# Altium PCB ISL6236A_DEMO_PCB_V1I1.PcbDoc
Units mm, origin at the board's own origin, x right, y up, seen from the top; angles counter-clockwise.
Board outline 50 x 50 mm, 6 copper layers (L1, L2, L3, L4, L5, L6), stack 0.816 mm thick; 41 components, 27 nets, 119 pads, 100 vias.
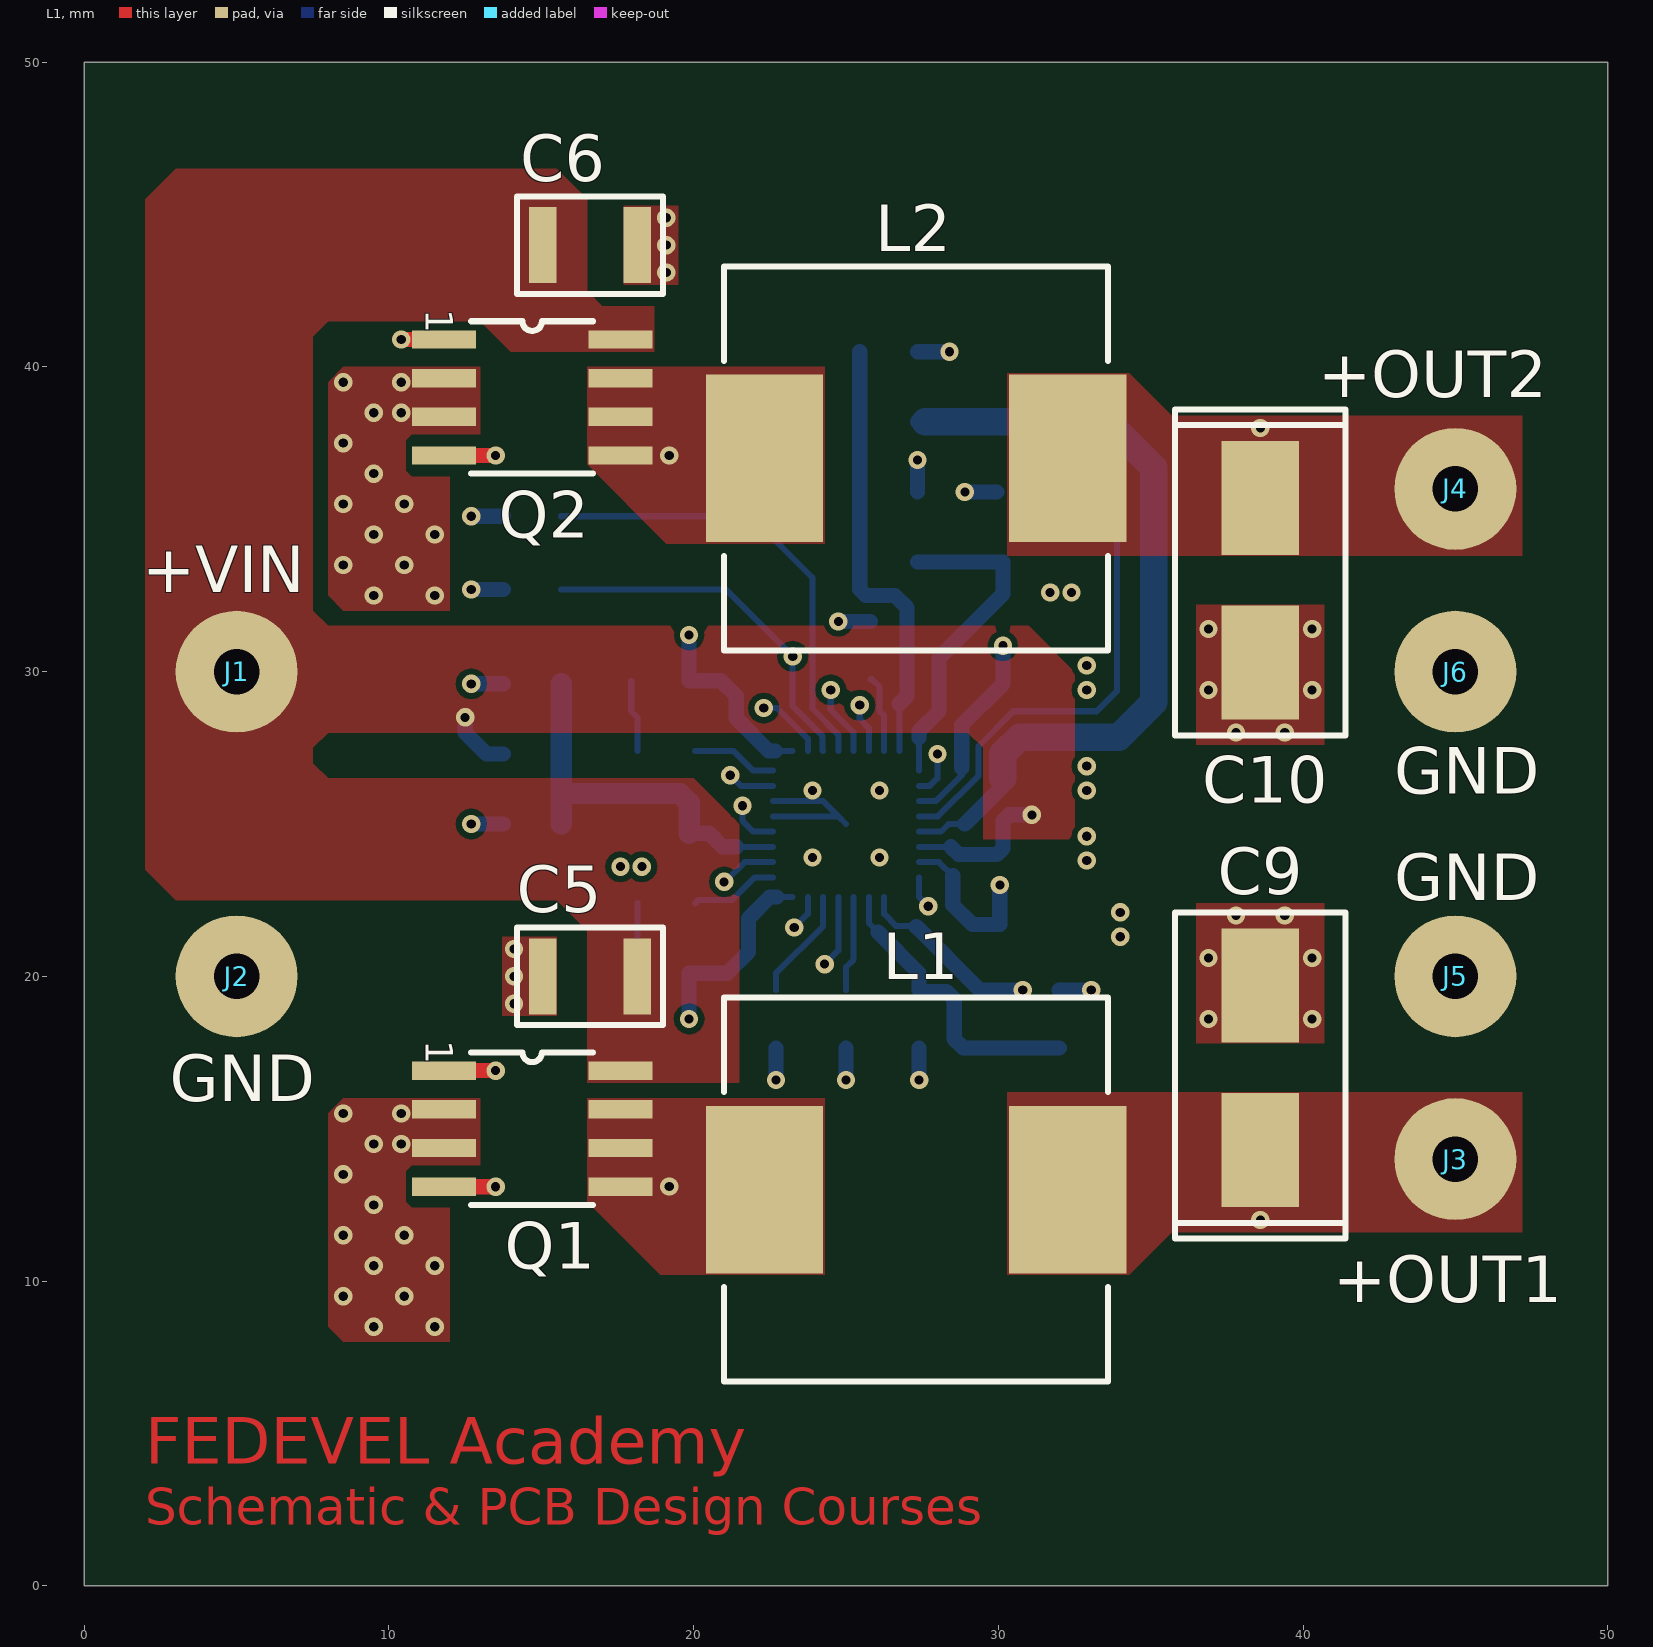
[diagram p0: L1 view]
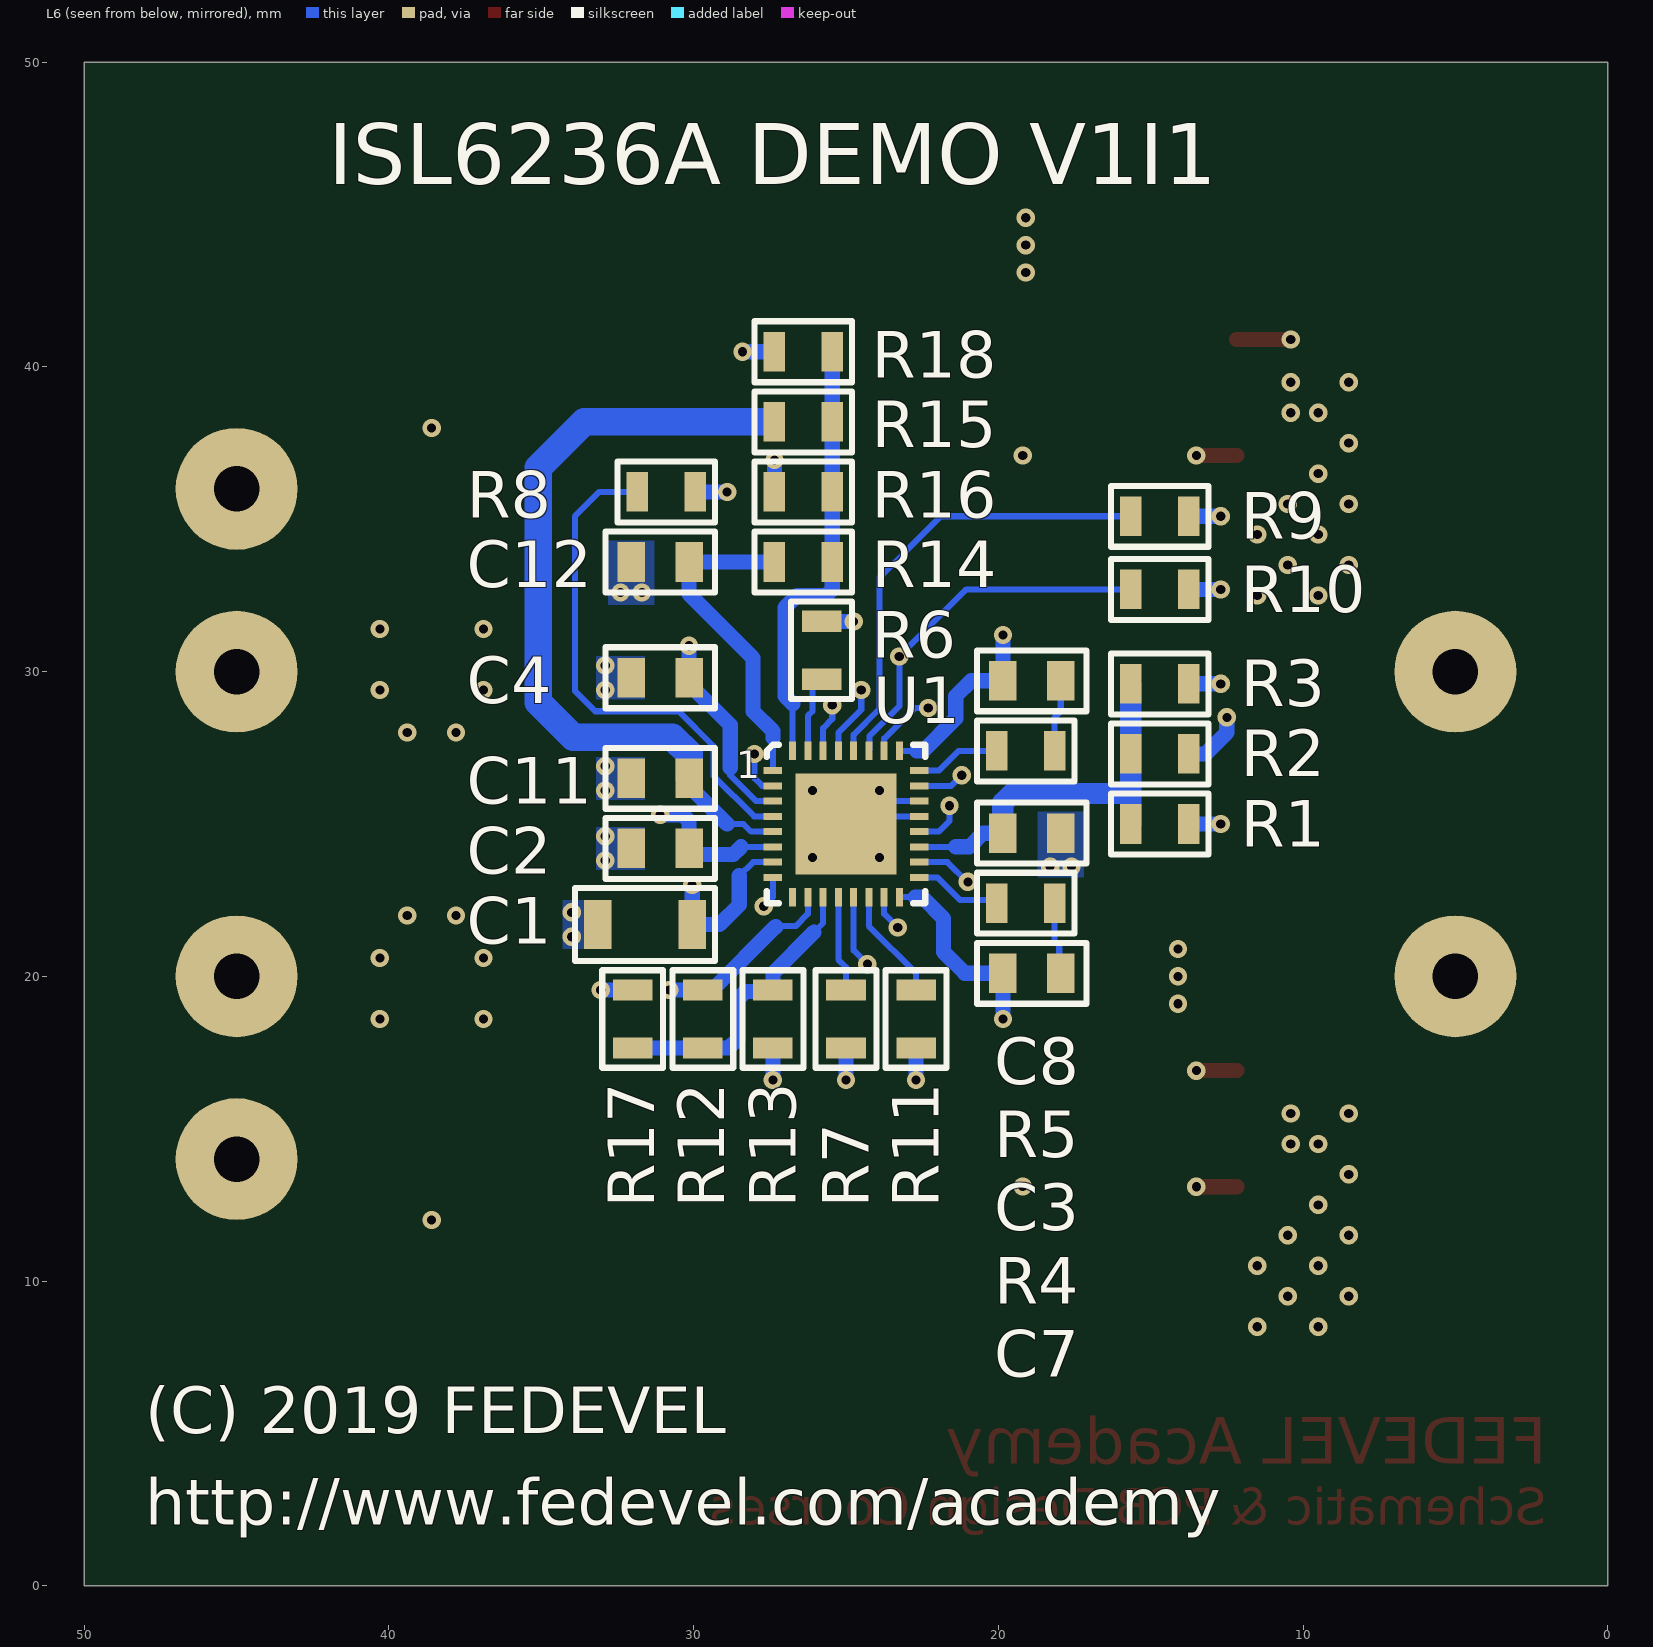
[diagram p1: L6 view, seen from below]
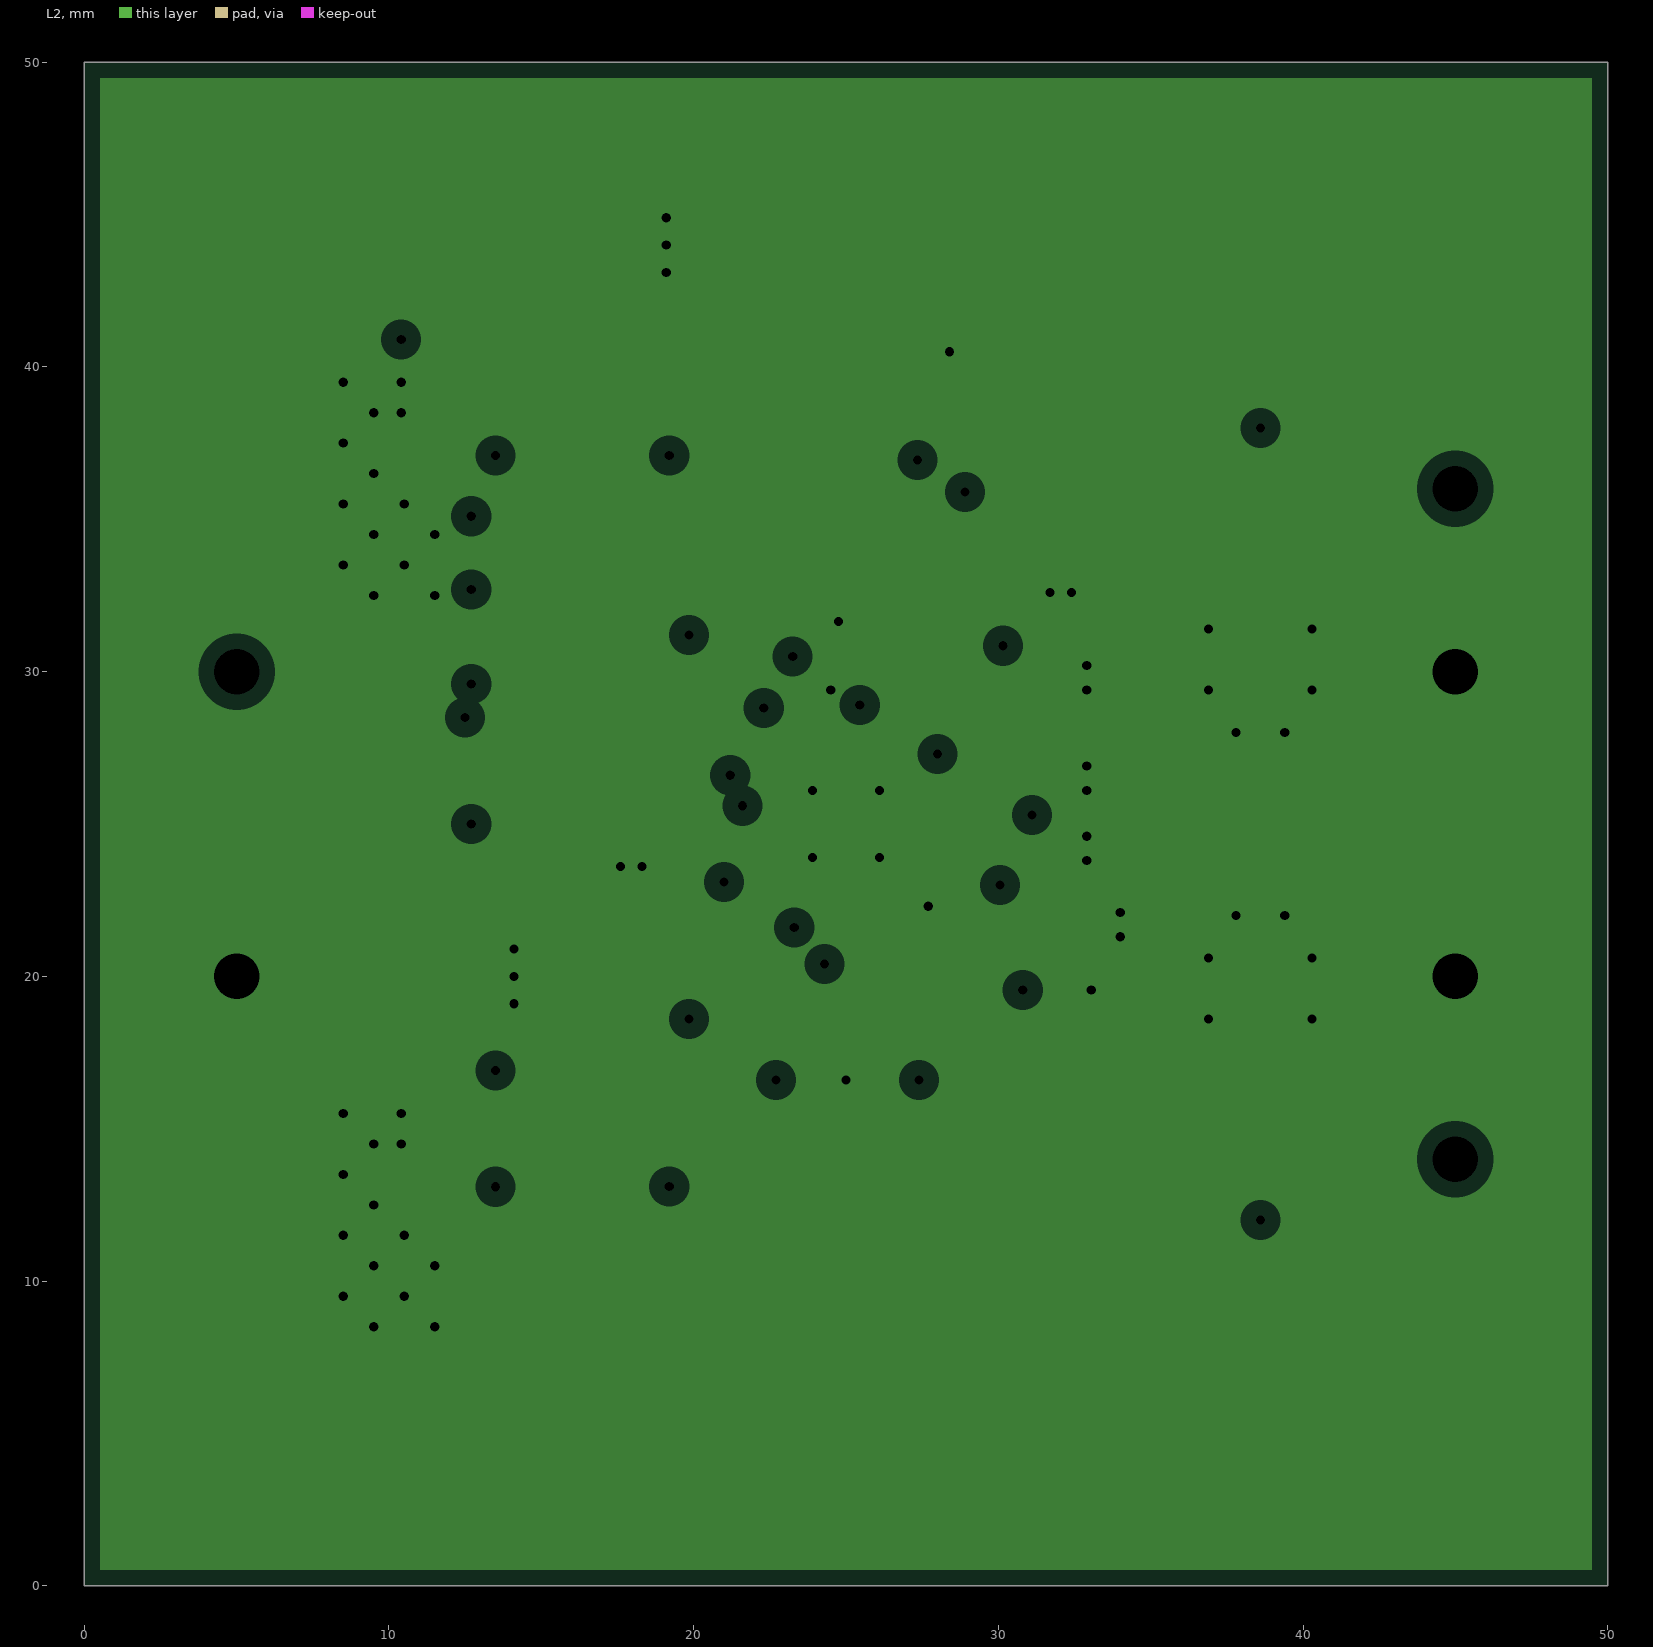
[diagram p2: L2, clearances drawn from the general rule]
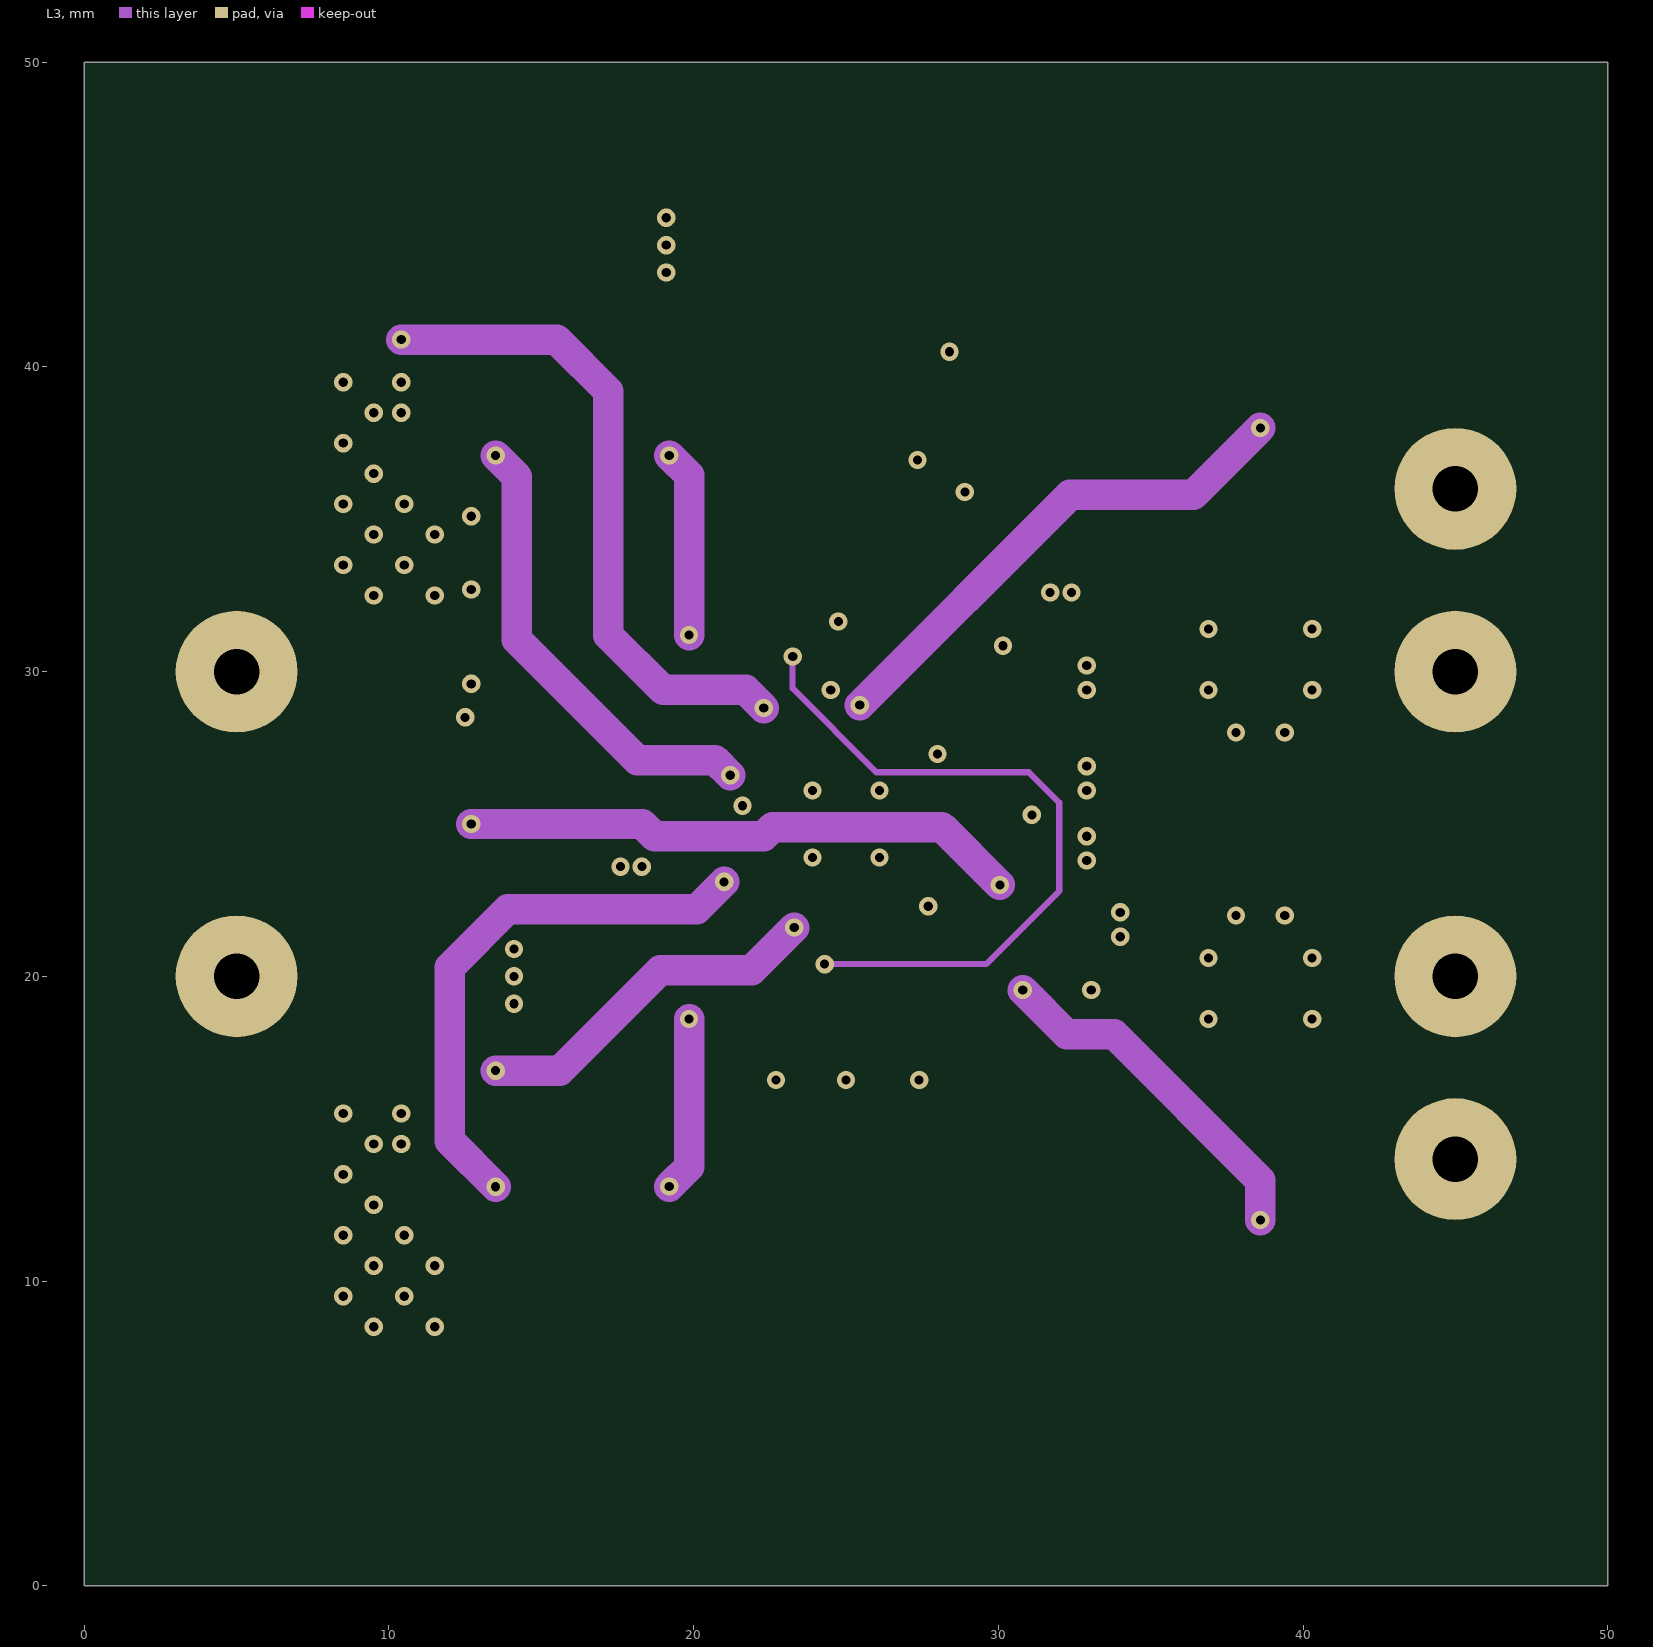
[diagram p3: L3]
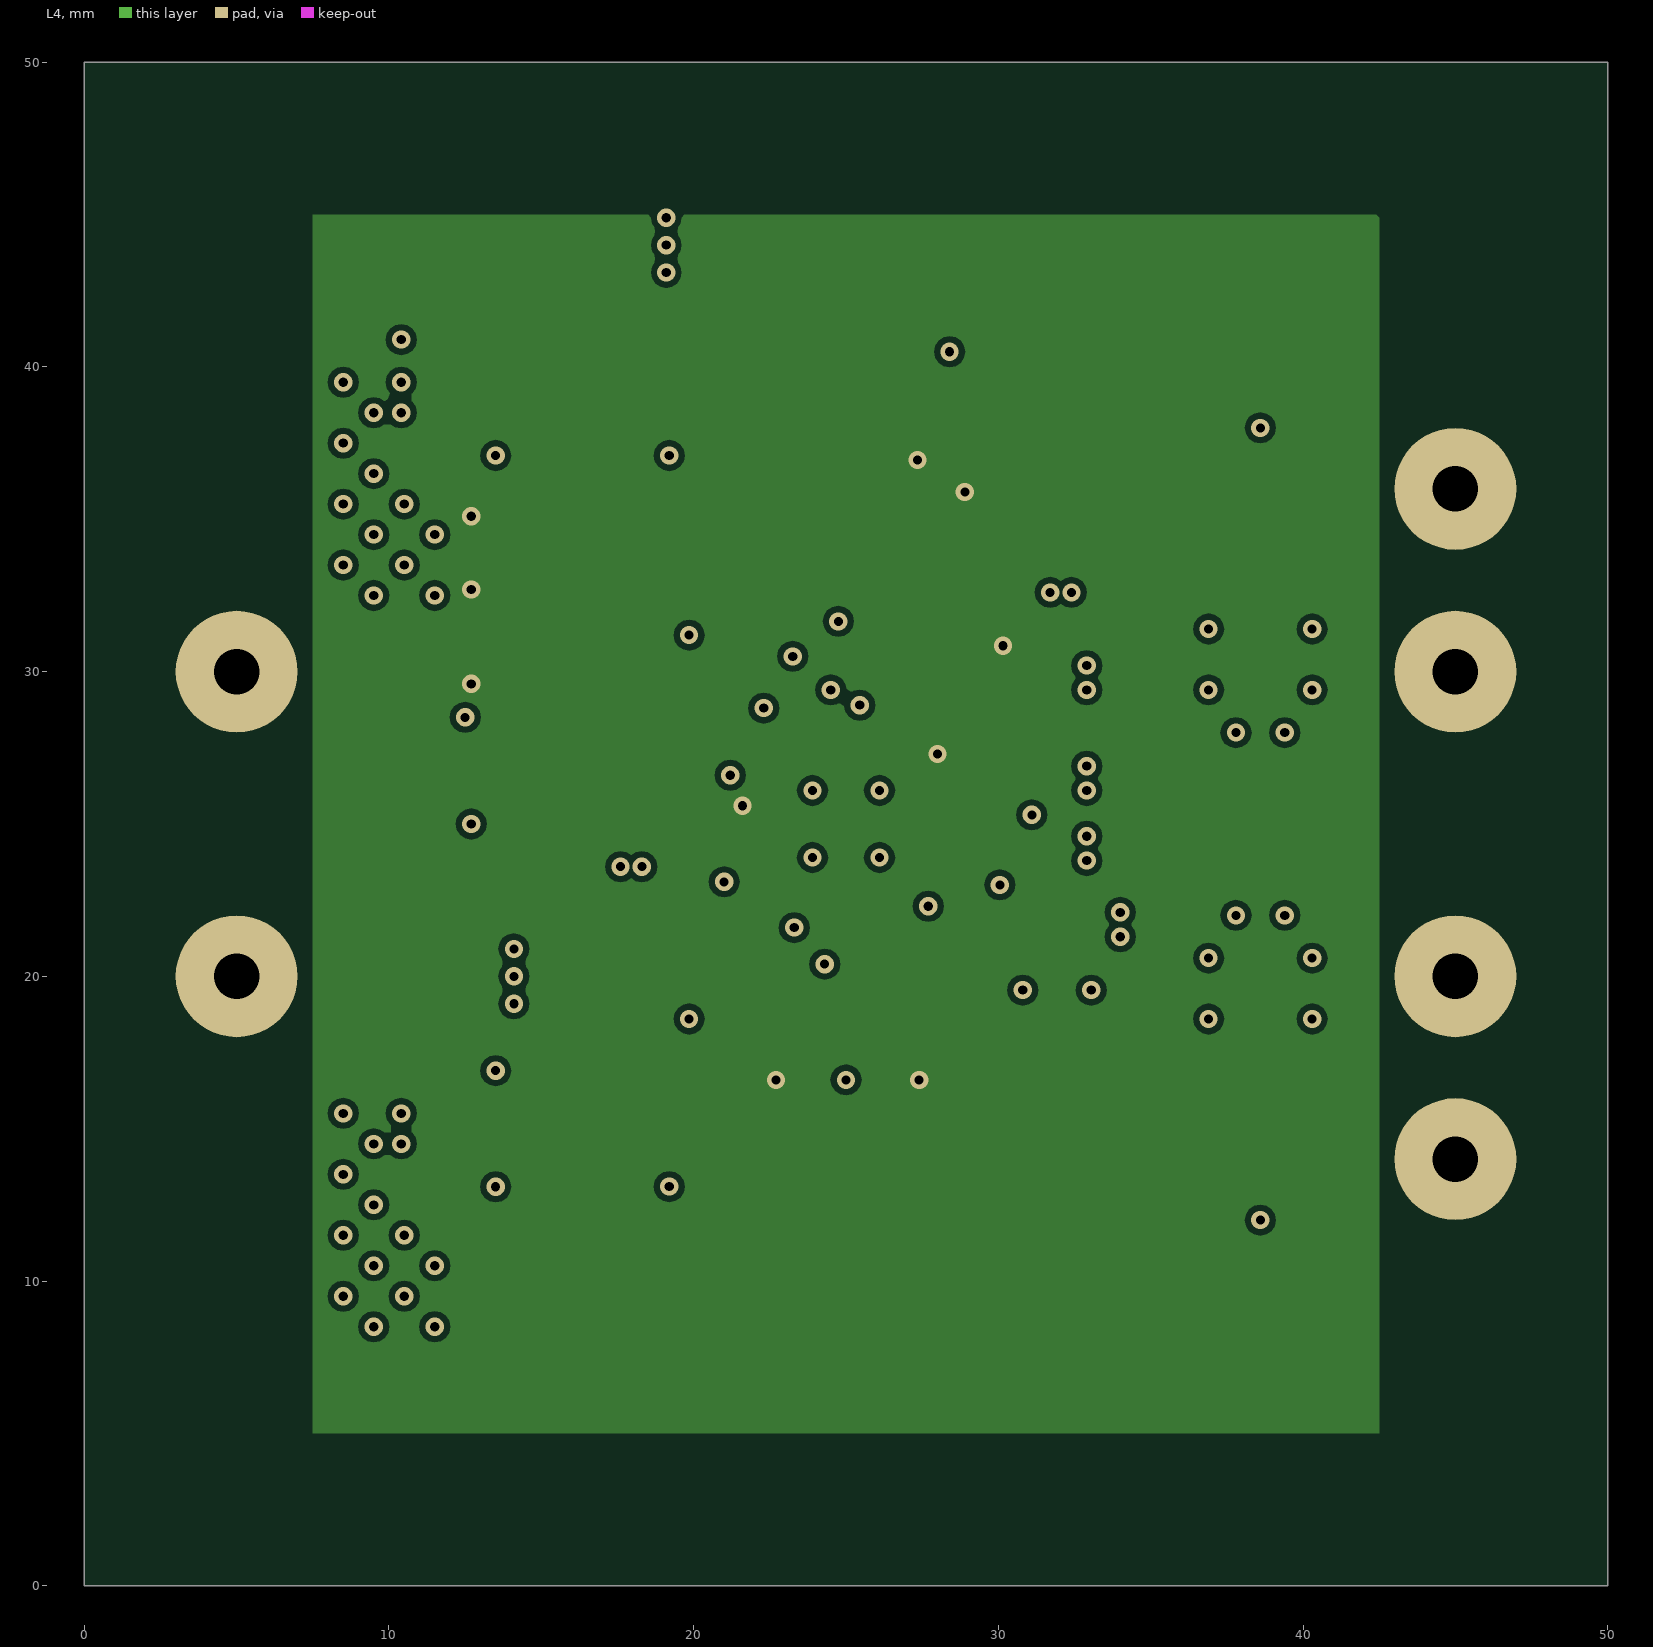
[diagram p4: L4]
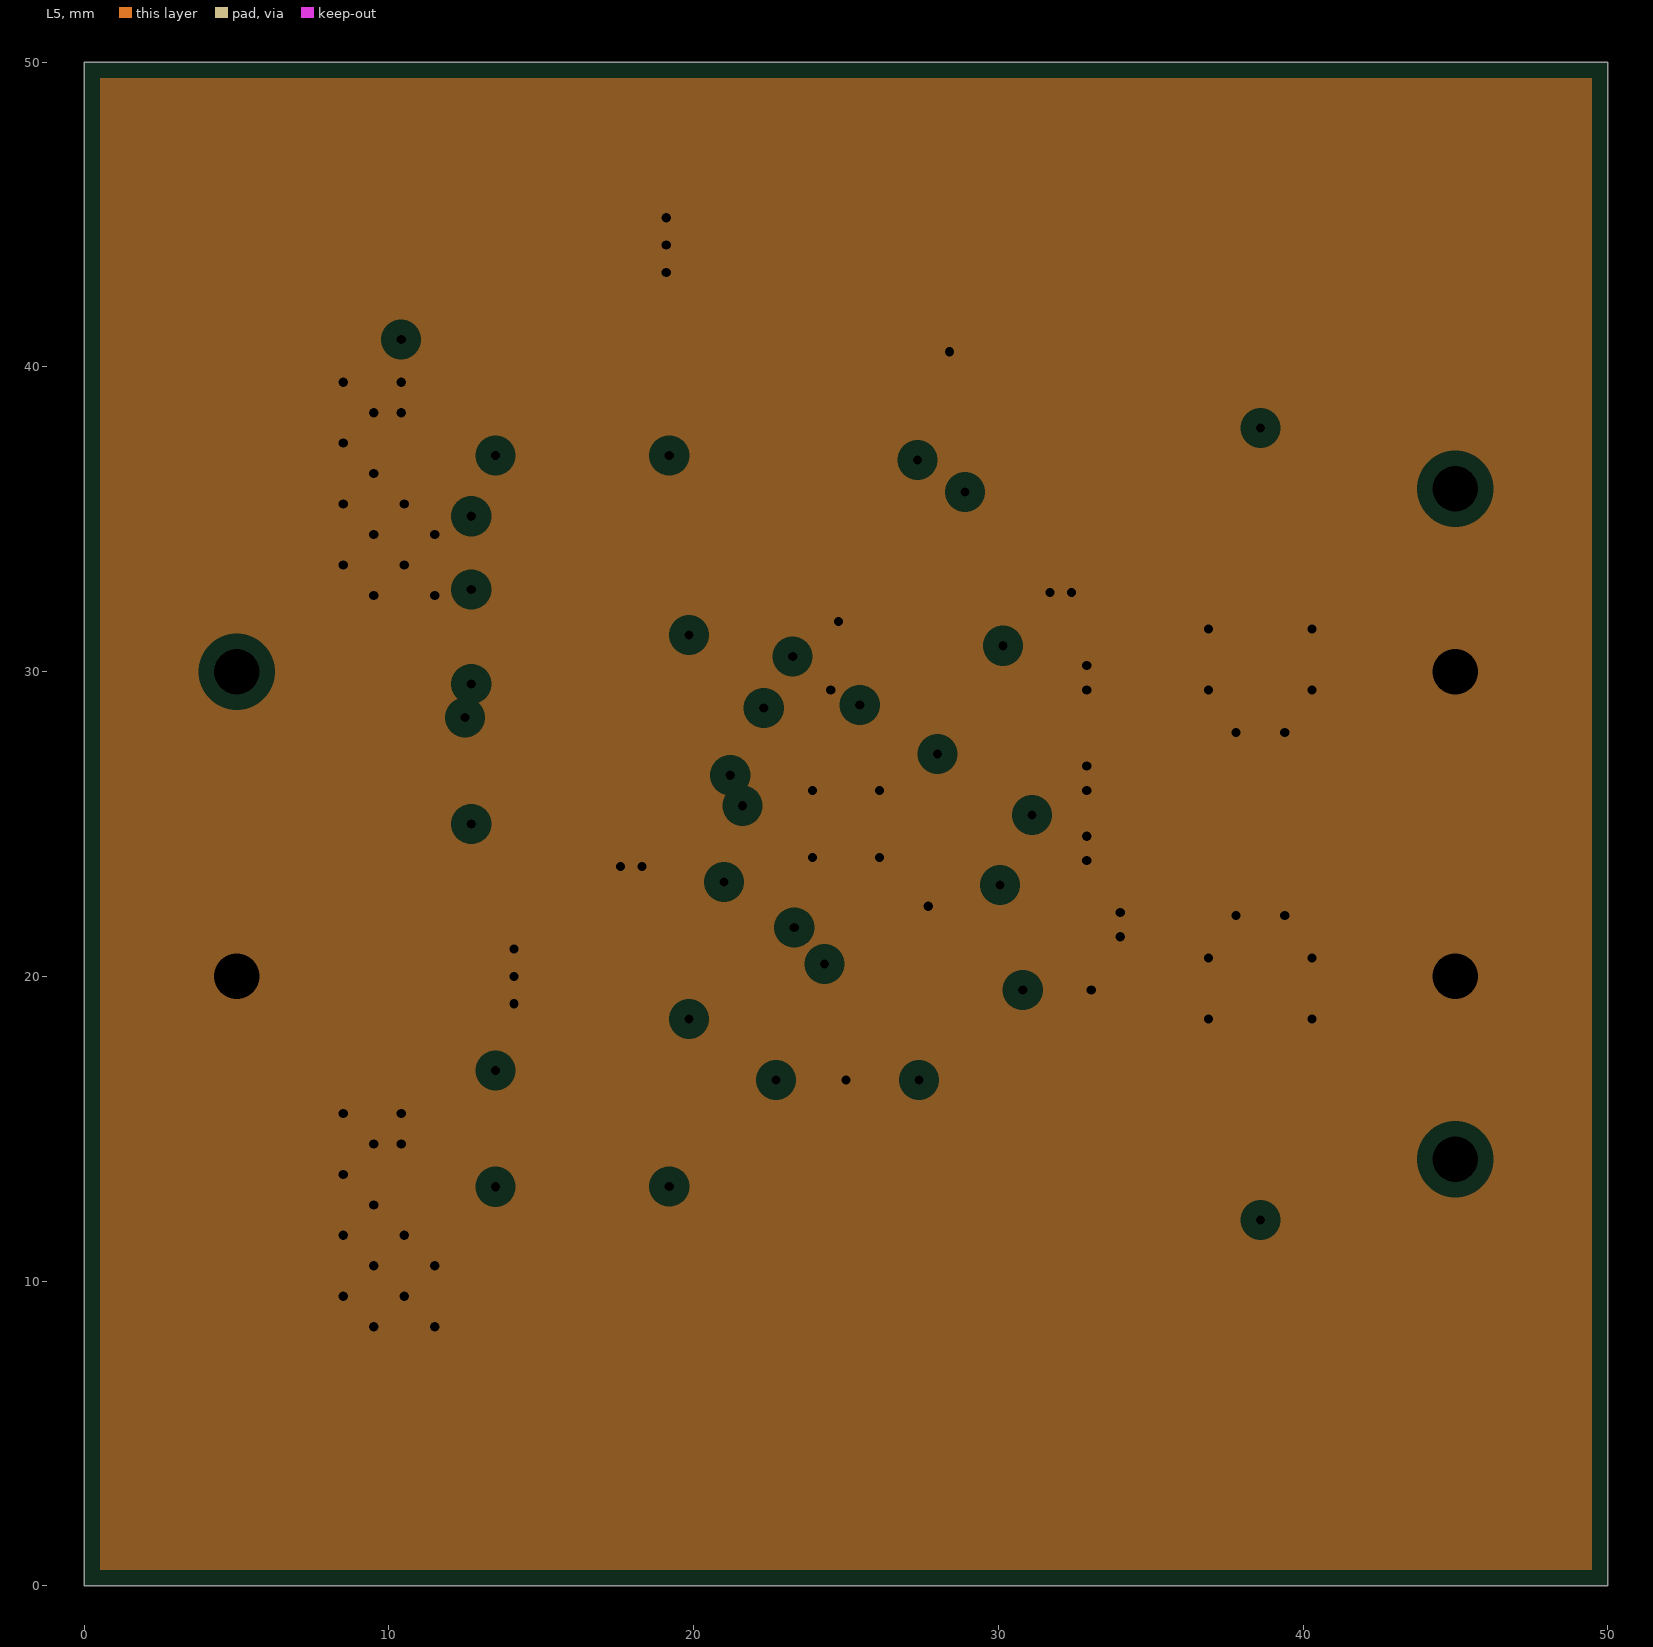
[diagram p5: L5, clearances drawn from the general rule]

## Layer stack, top to bottom
Top Solder: solder mask 0.0102, Solder Resist, Dk 3.5
L1: signal copper 0.0356
Dielectric 2: prepreg 0.0711, PP-006, Dk 4.1
L2: plane copper 0.035, net GND
Dielectric 3: prepreg 0.0711, PP-006, Dk 4.1
L3: signal copper 0.035
Dielectric 4: prepreg 0.0711, PP-006, Dk 4.1
L4: signal copper 0.035
Dielectric 5: prepreg 0.0711, PP-006, Dk 4.1
L5: plane copper 0.035, net GND
Dielectric 1: dielectric 0.32, FR-4, Dk 4.8
L6: signal copper 0.0356
Bottom Solder: solder mask 0.0102, Solder Resist, Dk 3.5

## Board outline
0,0 50,0 50,50 0,50

## Design rules (kind name [scope] priority, off if disabled: settings)
Clearance [All] p1: gap=0.2 ignorepadtopadclearanceinfootprint=FALSE
ComponentClearance [All] p1: gap=0.099 collisioncheckmode=3 verticalgap=0.099 showdistances=FALSE
MinimumSolderMaskSliver [All] p1: minsoldermaskwidth=0.1
PlaneClearance [All] p1: clearance=0.508
PlaneConnect [All] p1: pad.planeconnectstyle=Relief pad.reliefexpansion=0.508 pad.reliefentries=4 pad.reliefconductorwidth=1 pad.reliefairgap=0.5 via.planeconnectstyle=Direct via.reliefexpansion=0.508 via.reliefentries=4 via.reliefconductorwidth=0.254 via.reliefairgap=0.254
PolygonConnect [All] p1: connectstyle=Direct reliefconductorwidth=0.254 reliefentries=4 polygonreliefangle="90 Angle" airgapwidth=0.254
RoutingVias [All] p1: holewidth=0.3 width=0.6 viastyle="Through Hole" minholewidth=0.3 minwidth=0.6 maxholewidth=0.3 maxwidth=0.6
SilkToSolderMaskClearance [IsPad] p1: minsilkscreentomaskgap=0.1 clearancetoexposedcopper=TRUE
SolderMaskExpansion [All] p1: expansion=0.102
Width [All] p1: maxlimit=10 minlimit=0.2 preferedwidth=0.2
25 further rules are at their usual default settings.

## Components (designator, comment, footprint, x,y, rotation, side; value= is the part's Value field where it differs from the comment)
C1 "4u7, 50V" C1206 31.6,21.7 r180 bottom
C2 "1uF, 50V" C0805 31.1,24.2 r180 bottom
C3 "1uF, 50V" C0805 18.9,24.7 r0 bottom
C4 "1uF, 50V" C0805 31.1,29.8 r180 bottom
C5 "10uF, 35V" C1210 16.6,20 r0 top
C6 "10uF, 35V" C1210 16.6,44 r180 top
C7 "100nF" C0805 18.9,20.1 r180 bottom
C8 "220nF" C0805 18.9,29.7 r0 bottom
C9 "330uF, 10V" 7343-43 38.6,17 r90 top
C10 "330uF, 10V" 7343-43 38.6,33 r270 top
C11 "10nF" C0805 31.1,26.5 r0 bottom
C12 "100nF" C0805 31.1,33.6 r0 bottom
J1 "4MMx1.5MM" PAD_WITH_HOLE_4MMx1MM5 5,30 r0 top
J2 "4MMx1.5MM" PAD_WITH_HOLE_4MMx1MM5 5,20 r0 top
J3 "4MMx1.5MM" PAD_WITH_HOLE_4MMx1MM5 45,14 r0 top
J4 "4MMx1.5MM" PAD_WITH_HOLE_4MMx1MM5 45,36 r0 top
J5 "4MMx1.5MM" PAD_WITH_HOLE_4MMx1MM5 45,20 r0 top
J6 "4MMx1.5MM" PAD_WITH_HOLE_4MMx1MM5 45,30 r0 top
L1 "3u3, DR125-3R3-R" DR125 27.3,13 r180 top
L2 "2u2, DR125-2R2-R" DR125 27.3,37 r0 top
Q1 "SI4816BDY-T1-E3" SO-8 14.7,15 r0 top
Q2 "SI4816BDY-T1-E3" SO-8 14.7,39 r0 top
R1 "0R" R0805 14.7,25 r180 bottom
R2 "0R" R0805 14.7,27.3 r0 bottom
R3 "10R" R0805 14.7,29.6 r180 bottom
R4 "1R" R0805 19.1,22.4 r0 bottom
R5 "1R" R0805 19.1,27.4 r180 bottom
R6 "200k" R0805 25.8,30.7 r90 bottom
R7 "200k" R0805 25,18.6 r90 bottom
R8 "10k" R0805 30.9,35.9 r180 bottom
R9 "200k" R0805 14.7,35.1 r180 bottom
R10 "200k" R0805 14.7,32.7 r180 bottom
R11 "10k" R0805 22.7,18.6 r270 bottom
R12 "DNF" R0805 29.7,18.6 r90 bottom
R13 "0R" R0805 27.4,18.6 r270 bottom
R14 "DNF" R0805 26.4,33.6 r0 bottom
R15 "0R" R0805 26.4,38.2 r0 bottom
R16 "DNF" R0805 26.4,35.9 r0 bottom
R17 "DNF" R0805 32,18.6 r270 bottom
R18 "DNF" R0805 26.4,40.5 r180 bottom
U1 "ISL6236AIRZ" L32.5x5B 25,25 r180 bottom

## Footprints (in the part's own frame and the unit in brackets; to place one, negate y for a bottom-side part, rotate by r counter-clockwise, add the part's x,y. Pads: shape width x height; smd on the part's side, far side on the other; paste and mask are expansions set on the pad)
7343-43 [mm]
  rect 3.75x2.55 smd: 1(-2.7,0) 2(2.7,0)
  silkscreen extent -5.6,-2.8 5.1,2.8
C0805 [mm]
  rect 0.9x1.3 smd: 1(-0.95,0) 2(0.95,0)
  silkscreen extent -1.8,-1 1.8,1
C1206 [mm]
  rect 0.9x1.6 smd: 1(-1.55,0) 2(1.55,0)
  silkscreen extent -2.3,-1.2 2.3,1.2
C1210 [mm]
  rect 0.9x2.5 smd: 1(-1.55,0) 2(1.55,0)
  silkscreen extent -2.4,-1.6 2.4,1.6
DR125 [mm]
  rect 3.85x5.5 smd: 1(-4.975,0) 2(4.975,0)
  silkscreen extent -6.3,-6.3 6.3,6.3
L32.5x5B [mm]
  rect 0.6x0.23 smd mask+0.051: 1(-2.4,1.75) 2(-2.4,1.25) 3(-2.4,0.75) 4(-2.4,0.25) 5(-2.4,-0.25) 6(-2.4,-0.75) 7(-2.4,-1.25) 8(-2.4,-1.75) 17(2.4,-1.75) 18(2.4,-1.25) 19(2.4,-0.75) 20(2.4,-0.25) 21(2.4,0.25) 22(2.4,0.75) 23(2.4,1.25) 24(2.4,1.75)
  rect 0.23x0.6 smd mask+0.051: 9(-1.75,-2.4) 10(-1.25,-2.4) 11(-0.75,-2.4) 12(-0.25,-2.4) 13(0.25,-2.4) 14(0.75,-2.4) 15(1.25,-2.4) 16(1.75,-2.4) 25(1.75,2.4) 26(1.25,2.4) 27(0.75,2.4) 28(0.25,2.4) 29(-0.25,2.4) 30(-0.75,2.4) 31(-1.25,2.4) 32(-1.75,2.4)
  rect 3.3x3.3 smd mask+0.051: 33(0,0)
  silkscreen extent -2.6,-2.6 2.6,2.6
PAD_WITH_HOLE_4MMx1MM5 [mm]
  round 4 hole 1.5: 1(0,0)
R0805 [mm]
  rect 0.7x1.3 smd: 1(-0.95,0) 2(0.95,0)
  silkscreen extent -1.6,-1 1.6,1
SO-8 [mm]
  rect 2.1x0.6 smd: 1(-2.9,1.905) 2(-2.9,0.635) 3(-2.9,-0.635) 4(-2.9,-1.905) 5(2.9,-1.905) 6(2.9,-0.635) 7(2.9,0.635) 8(2.9,1.905)
  silkscreen extent -2,-2.5 2,2.5

## Part data
C1: library part C3216X5R1H475K160AB, "CAP CER 4.7UF 50V X5R 1206", Capacitance=4.7uF, Case/Package=1206, Case Code (Metric)=3216, Dielectric=X5R, Dielectric Material=Ceramic, Manufacturer=TDK, Max Operating Temperature=85°C, Min Operating Temperature=-55°C, Package Quantity=1, Supplier Part Number 1=445-5994-1-ND, Tolerance=10%, Voltage Rating=50V, Case Code (Imperial)=1206, ComponentLink1Description=http://www.mouser.com/ds/2/400/lcc_commercial_general_en-837201.pdf, ComponentLink1URL=http://www.mouser.com/ds/2/400/lcc_commercial_general_en-837201.pdf, ComponentLink2Description=https://product.tdk.com/en/products/common/pdf/mlcc_partnumber_description.pdf, ComponentLink2URL=https://product.tdk.com/en/products/common/pdf/mlcc_partnumber_description.pdf, ComponentLink3Description=https://product.tdk.com/info/en/documents/chara_sheet/C3216X5R1H475K160AB.pdf, ComponentLink3URL=https://product.tdk.com/info/en/documents/chara_sheet/C3216X5R1H475K160AB.pdf, Composition=Ceramic, Depth=1.6mm, Height=1.6mm, Lead Free="Lead Free", Length=3.2mm, Manufacturer Part Number=C3216X5R1H475K160AB, Mount="Surface Mount", Packaging="Tape and Reel", Pricing 1="1 = 1.02000, 10 = 0.75500, 100 = 0.51750, 500 = 0.40968, 1000 = 0.34500 (USD)", RoHS=Yes, Stock 1=5017, Supplier 1=Digi-Key, Termination=SMD/SMT, Thickness=0.071inch, Voltage Rating (DC)=50V, Weight=0.000571oz, Width=1.6mm
C2 C3 C4: library part C0805C105K5RACTU, "Multilayer Ceramic Capacitors MLCC - SMD/SMT 1uF 50 Volts 10% X7R", Capacitance=1uF, Case/Package=0805, Case Code (Metric)=2012, Dielectric=X7R, Dielectric Material=Ceramic, Manufacturer=KEMET, Max Operating Temperature=125°C, Min Operating Temperature=-55°C, Package Quantity=1, Supplier Part Number 1=399-7409-1-ND, Tolerance=10%, Voltage=50V, Case Code (Imperial)=0805, ComponentLink1Description=http://www.farnell.com/datasheets/1851736.pdf, ComponentLink1URL=http://www.farnell.com/datasheets/1851736.pdf, ComponentLink2Description=http://www.mouser.com/ds/2/212/KEM_C1002_X7R_SMD-1102033.pdf, ComponentLink2URL=http://www.mouser.com/ds/2/212/KEM_C1002_X7R_SMD-1102033.pdf, Contact Plating=Matte,Tin, Depth=1.25mm, Height=1.25mm, Length=2mm, Manufacturer Part Number=C0805C105K5RACTU, Mount="PCB,Surface Mount", Packaging="Tape and Reel", Pricing 1="1 = 0.45000, 10 = 0.31500, 100 = 0.18890, 500 = 0.14166, 1000 = 0.11963 (USD)", REACH SVHC="No SVHC", RoHS=Yes, Stock 1=58300, Supplier 1=Digi-Key, Termination=SMD/SMT, Thickness=0.055inch, Voltage Rating=50V, Voltage Rating (DC)=50V, Width=0.049inch
C5 C6: library part C1210C106K6PACTU, "1210 C 10uF Ceramic Multilayer Capacitor,  35 VDC,  +85degC,  X5R Dielec,  +/-10%", Capacitance=10uF, Case/Package=1210, Case Code (Metric)=3225, Dielectric=X5R, Dielectric Material=Ceramic, Manufacturer=KEMET, Max Operating Temperature=85°C, Min Operating Temperature=-55°C, Supplier Part Number 1=399-12070-1-ND, Tolerance=10%, Voltage=35V, Case Code (Imperial)=1210, Depth=2.5mm, Dissipation Factor=2.5%, Height=1.9mm, Lead Free="Lead Free", Length=0.126inch, Manufacturer Part Number=C1210C106K6PACTU, Mount="Surface Mount", Packaging="Tape and Reel", Pricing 1="1 = 0.93000, 10 = 0.68600, 100 = 0.47030, 500 = 0.37228, 1000 = 0.31350 (USD)", RoHS=Yes, Stock 1=752, Supplier 1=Digi-Key, Termination=Solder, Thickness=0.083inch, Voltage Rating=35V, Voltage Rating (DC)=35V, Width=0.098inch
C7 C12: library part C0805C104K5RAC7800, "Multilayer Ceramic Capacitors MLCC - SMD/SMT 50volts 0.1uF X7R 10%", Case/Package=0805, Case Code (Metric)=2012, Dielectric=X7R, Manufacturer=KEMET, Max Operating Temperature=125°C, Min Operating Temperature=-55°C, Package Quantity=4000, Supplier Part Number 1=399-1170-1-ND, Tolerance=10%, Voltage=50V, Capacitance=100nF, Case Code (Imperial)=0805, ComponentLink1Description=http://www.mouser.com/ds/2/212/KEM_C1002_X7R_SMD-1102033.pdf, ComponentLink1URL=http://www.mouser.com/ds/2/212/KEM_C1002_X7R_SMD-1102033.pdf, ComponentLink2Description=https://www.distrelec.biz/Web/Downloads/_t/ds/KEM_C1002_X7R_SMD_eng_tds.pdf?mime=application%2Fpdf, ComponentLink2URL=https://www.distrelec.biz/Web/Downloads/_t/ds/KEM_C1002_X7R_SMD_eng_tds.pdf?mime=application%2Fpdf, Depth=1.25mm, Height=0.9mm, Lead Pitch=0.75mm, Length=2mm, Manufacturer Part Number=C0805C104K5RAC7800, Mount="Surface Mount", Packaging="Tape and Reel", Pricing 1="1 = 0.24000, 10 = 0.17300, 100 = 0.08130, 500 = 0.05700, 1000 = 0.04719 (USD)", Radiation Hardening=No, RoHS=Yes, Stock 1=310062, Supplier 1=Digi-Key, Termination=SMD/SMT, Voltage Rating=50V, Voltage Rating (DC)=50V, Width=1.2mm
C8: library part C0805C224K5RACTU, "CAP CER 0.22UF 50V X7R 0805", Case/Package=0805, Case Code (Metric)=2012, Dielectric=X7R, Dielectric Material=Ceramic, Manufacturer=KEMET, Max Operating Temperature=125°C, Min Operating Temperature=-55°C, Package Quantity=1, Supplier Part Number 1=399-3491-1-ND, Tolerance=10%, Voltage=50V, Capacitance=220nF, Case Code (Imperial)=0805, ComponentLink1Description=http://www.kemet.com/kemet/web/homepage/kechome.nsf/vapubfiles/KEM_C1002_X7R_SMD.pdf/$file/KEM_C1002_X7R_SMD.pdf, ComponentLink1URL=http://www.kemet.com/kemet/web/homepage/kechome.nsf/vapubfiles/KEM_C1002_X7R_SMD.pdf/$file/KEM_C1002_X7R_SMD.pdf, ComponentLink2Description=https://www.verical.com/server-webapp/html/getDatasheet?partID=304413, ComponentLink2URL=https://www.verical.com/server-webapp/html/getDatasheet?partID=304413, ComponentLink3Description=http://www.farnell.com/datasheets/1851736.pdf, ComponentLink3URL=http://www.farnell.com/datasheets/1851736.pdf, ComponentLink4Description=https://search.kemet.com/component-edge/download/datasheet/C0805C224K5RACTU.pdf, ComponentLink4URL=https://search.kemet.com/component-edge/download/datasheet/C0805C224K5RACTU.pdf, Depth=1.25mm, Dissipation Factor=2.5%, Height=0.9mm, Lead Pitch=0.75mm, Length=2mm, Manufacturer Part Number=C0805C224K5RACTU, Mount="PCB,Surface Mount", Packaging="Tape and Reel", Pricing 1="1 = 0.22000, 10 = 0.15800, 100 = 0.07440, 500 = 0.05220, 1000 = 0.04321 (USD)", Radiation Hardening=No, REACH SVHC="No SVHC", RoHS=Yes, Stock 1=1343663, Supplier 1=Digi-Key, Termination=SMD/SMT, Thickness=0.055inch, Voltage Rating=50V, Voltage Rating (DC)=50V, Width=0.049inch
C9 C10: library part T530X337M010ATE004, "Tantalum Capacitors - Polymer SMD 330uF 10volts 20%", Capacitance=330uF, Case/Package=2917, Case Code (Metric)=7343, ESR (Equivalent Series Resistance)=4mR, Leakage Current=330uA, Manufacturer=KEMET, Max Operating Temperature=125°C, Min Operating Temperature=-55°C, Package Quantity=500, Ripple Current=8.2A, Supplier Part Number 1=399-10378-1-ND, Tolerance=20%, Voltage=10V, Case Code (Imperial)=2917, ComponentLink1Description=https://www.alliedelec.com/m/d/c2b5846d1b4015924ec44504ba06510b.pdf, ComponentLink1URL=https://www.alliedelec.com/m/d/c2b5846d1b4015924ec44504ba06510b.pdf, ComponentLink2Description=http://uk.rs-online.com/webdocs/1529/0900766b815291cb.pdf, ComponentLink2URL=http://uk.rs-online.com/webdocs/1529/0900766b815291cb.pdf, Depth=4.3mm, Dissipation Factor=8%, Features="General Purpose", Height=4mm, Height - Seated (Max)=0.169inch, Length=7.3mm, Life (Hours)=2000Hour, Manufacturer Part Number=T530X337M010ATE004, Mount="PCB,Surface Mount", Packaging="Tape and Reel", Polarity=Polar, Pricing 1="1 = 6.86000, 10 = 6.09500, 100 = 4.87600 (USD)", REACH SVHC="No SVHC", RoHS=Yes, Supplier 1=Digi-Key, Termination=SMD/SMT, Voltage Rating=10V, Voltage Rating (DC)=10V, Width=4.3mm
C11: library part C0805F103K5RACTU, "CAP CER 10000PF 50V X7R 0805", Case/Package=0805, Case Code (Metric)=2012, Dielectric=X7R, Dielectric Material=Ceramic, Manufacturer=KEMET, Max Operating Temperature=125°C, Min Operating Temperature=-55°C, Package Quantity=4000, Supplier Part Number 1=399-5107-1-ND, Tolerance=10%, Voltage=50V, Capacitance=10nF, Case Code (Imperial)=0805, ComponentLink1Description=https://search.kemet.com/component-edge/download/datasheet/C0805F103K5RACTU.pdf, ComponentLink1URL=https://search.kemet.com/component-edge/download/datasheet/C0805F103K5RACTU.pdf, ComponentLink2Description=http://www.farnell.com/datasheets/2317279.pdf, ComponentLink2URL=http://www.farnell.com/datasheets/2317279.pdf, Depth=1.25mm, Height=0.9mm, Lead Pitch=0.75mm, Length=2mm, Manufacturer Part Number=C0805F103K5RACTU, Mount="Surface Mount", Number of Pins=2, Packaging="Cut Tape", Pricing 1="1 = 0.39000, 10 = 0.27000, 100 = 0.16190, 500 = 0.12142, 1000 = 0.10253 (USD)", REACH SVHC="No SVHC", RoHS=Yes, Stock 1=75209, Supplier 1=Digi-Key, Termination=SMD/SMT, Thickness=0.039inch, Voltage Rating=50V, Voltage Rating (DC)=50V, Width=1.25mm
J1 J2 J3 J4 J5 J6: library part PAD_WITH_HOLE_4MMx1MM5, "Pad with a hole 4mm x 1.5mm"
L1: library part DR125-3R3-R, "Inductor Power Shielded Drum Core 3.084uH/3.3uH 20% 100KHz Ferrite 9.26A 6.3mOhm DCR T/R", Case/Package=Nonstandard, Current Rating=9.26A, DC Resistance (DCR)=6.3mR, Inductance=3.3uh, Inductance Tolerance=20%, Manufacturer="Eaton Cooper", Max Operating Temperature=125°C, Min Operating Temperature=-40°C, Package Quantity=600, Saturation Current=12.7A, Self Resonant Frequency=100kHz, Supplier Part Number 1=513-1529-1-ND, ComponentLink1Description=http://uk.rs-online.com/webdocs/116a/0900766b8116a153.pdf, ComponentLink1URL=http://uk.rs-online.com/webdocs/116a/0900766b8116a153.pdf, ComponentLink2Description=https://www.verical.com/server-webapp/html/getDatasheet?partID=251124, ComponentLink2URL=https://www.verical.com/server-webapp/html/getDatasheet?partID=251124, ComponentLink3Description=http://www.farnell.com/datasheets/87246.pdf, ComponentLink3URL=http://www.farnell.com/datasheets/87246.pdf, ComponentLink4Description=http://www.cooperindustries.com/content/dam/public/bussmann/Electronics/Resources/product-datasheets/Bus_Elx_DS_4315_DR_Series.pdf, ComponentLink4URL=http://www.cooperindustries.com/content/dam/public/bussmann/Electronics/Resources/product-datasheets/Bus_Elx_DS_4315_DR_Series.pdf, ComponentLink5Description=http://www.onlinecomponents.com/productFiles/mf-COI/4a32919a-7470-4ae0-be45-b59e3a1351ef.pdf, ComponentLink5URL=http://www.onlinecomponents.com/productFiles/mf-COI/4a32919a-7470-4ae0-be45-b59e3a1351ef.pdf, Composition=Wirewound, Core Material=Ferrite, Depth=12.5mm, Height=6mm, Height - Seated (Max)=0.236inch, Length=12.5mm, Manufacturer Part Number=DR125-3R3-R, Max DC Current=9.26A, Military Standard=Not, Mount="Surface Mount", Number of Pins=2, Packaging="Tape and Reel", Pricing 1="1 = 2.03000, 10 = 1.87300, 100 = 1.31130 (USD)", Radiation Hardening=No, REACH SVHC="No SVHC", RMS Current (Irms)=9.26A, RoHS=Yes, Shielding=Shielded, Stock 1=3434, Supplier 1=Digi-Key, Termination=SMD/SMT, Test Frequency=100kHz, Tolerance=20%, Width=0.492inch
L2: library part DR125-2R2-R, "Fixed Inductors 2.2uH 15A 0.0045ohms", Case/Package=Nonstandard, Current Rating=10.9A, DC Resistance (DCR)=4.5mR, Inductance=2.2uh, Inductance Tolerance=20%, Manufacturer="Eaton Cooper", Max Operating Temperature=125°C, Min Operating Temperature=-40°C, Package Quantity=600, Saturation Current=15A, Self Resonant Frequency=100kHz, Supplier Part Number 1=513-1662-1-ND, ComponentLink1Description=https://www.verical.com/server-webapp/html/getDatasheet?partID=571249, ComponentLink1URL=https://www.verical.com/server-webapp/html/getDatasheet?partID=571249, ComponentLink2Description=http://uk.rs-online.com/webdocs/116a/0900766b8116a153.pdf, ComponentLink2URL=http://uk.rs-online.com/webdocs/116a/0900766b8116a153.pdf, ComponentLink3Description=http://www.farnell.com/datasheets/87246.pdf, ComponentLink3URL=http://www.farnell.com/datasheets/87246.pdf, Composition=Wirewound, Core Material=Ferrite, DC Current=10.9A, Depth=12.5mm, Height=6mm, Height - Seated (Max)=0.236inch, Lead Free="Lead Free", Length=12.5mm, Manufacturer Part Number=DR125-2R2-R, Max DC Current=10.9A, Military Standard=Not, Mount="Surface Mount", Number of Pins=2, Packaging="Tape and Reel", Pricing 1="1 = 2.03000, 10 = 1.87300, 100 = 1.31130 (USD)", Radiation Hardening=No, REACH SVHC="No SVHC", RMS Current (Irms)=10.9A, RoHS=Yes, Shielding=Shielded, Stock 1=105, Supplier 1=Digi-Key, Termination=SMD/SMT, Test Frequency=100kHz, Tolerance=20%, Weight=0.144oz, Width=0.492inch
Q1 Q2: "MOSFET 2N-CH 30V 5.8A 8-SOIC", Case/Package=SO, Continuous Drain Current (ID)=8.2A, Drain to Source Resistance=11.5mR, Drain to Source Voltage (Vdss)=30V, Gate to Source Voltage (Vgs)=20V, Manufacturer="Vishay Siliconix", Max Operating Temperature=150°C, Max Power Dissipation=1.25W, Min Operating Temperature=-55°C, On-State Resistance=18.5mR, Package Quantity=1, Supplier Part Number 1=SI4816BDY-T1-E3CT-ND, Threshold Voltage=1V, ComponentLink1Description=http://www.vishay.com/docs/73026/si4816bd.pdf, ComponentLink1URL=http://www.vishay.com/docs/73026/si4816bd.pdf, ComponentLink2Description=https://www.verical.com/server-webapp/html/getDatasheet?partID=99188, ComponentLink2URL=https://www.verical.com/server-webapp/html/getDatasheet?partID=99188, ComponentLink3Description=https://www.alliedelec.com/m/d/ccea3a815e37c52236fbabed3b2d7fee.pdf, ComponentLink3URL=https://www.alliedelec.com/m/d/ccea3a815e37c52236fbabed3b2d7fee.pdf, ComponentLink4Description=http://datasheet.iiic.cc/vishay_[siliconix]/SI4816BDY-T1-E3.pdf, ComponentLink4URL=http://datasheet.iiic.cc/vishay_[siliconix]/SI4816BDY-T1-E3.pdf, Element Configuration=Single, Fall Time=9ns, FET Type="2 N-Channel", Height=1.55mm, Lead Free="Lead Free", Length=5mm, Manufacturer Part Number=SI4816BDY-T1-E3, Mount="Surface Mount", Nominal Vgs=3V, Number of Channels=2, Number of Elements=2, Number of Pins=8, Packaging="Tape and Reel", Pricing 1="1 = 1.86000, 10 = 1.68100, 100 = 1.35110, 500 = 1.05086, 1000 = 0.87071 (USD)", Radiation Hardening=No, Rds On Max=18.5mR, REACH SVHC=Unknown, Rise Time=9ns, RoHS=Yes, Stock 1=7400, Supplier 1=Digi-Key, Turn-Off Delay Time=31ns, Turn-On Delay Time=13ns, Weight=0.006596oz, Width=4mm
R1 R2 R13 R15: library part AC0805JR-070RL, "Thick Film Resistors - SMD 1/8W 0.0ohm 5%", Case/Package=0805, Case Code (Metric)=2012, Manufacturer=Yageo, Max Operating Temperature=155°C, Max Power Dissipation=125mW, Min Operating Temperature=-55°C, Resistance=0mR, Supplier Part Number 1=YAG3755CT-ND, Temperature Coefficient=200ppm/°C, Tolerance=5%, Voltage Rating=150V, Case Code (Imperial)=0805, Composition="Thick Film", Features="Automotive AEC-Q200,Moisture Resistant", Height=0.024inch, Lead Free="Lead Free", Length=0.079inch, Manufacturer Part Number=AC0805JR-070RL, Number of Terminations=2, Packaging="Tape and Reel", Power Rating=125mW, Pricing 1="1 = 0.10000, 10 = 0.04500, 25 = 0.03240, 50 = 0.02480, 100 = 0.01820, 250 = 0.01392, 500 = 0.01112, 1000 = 0.00819 (USD)", RoHS=Yes, Stock 1=291433, Supplier 1=Digi-Key, Termination=SMD/SMT, Width=1.25mm
R3: library part AC0805FR-0710RL, "Thick Film Resistors - SMD 1/8W 10ohm 1%", Case/Package=0805, Case Code (Metric)=2012, Manufacturer=Yageo, Max Operating Temperature=155°C, Max Power Dissipation=125mW, Min Operating Temperature=-55°C, Supplier Part Number 1=YAG3690CT-ND, Temperature Coefficient=200ppm/°C, Tolerance=1%, Voltage Rating=150V, Case Code (Imperial)=0805, Composition="Thick Film", Depth=1.25mm, Features="Automotive AEC-Q200,Moisture Resistant", Height=0.024inch, Lead Free="Lead Free", Length=2mm, Manufacturer Part Number=AC0805FR-0710RL, Military Standard=Not, Number of Terminations=2, Packaging="Tape and Reel", Power Rating=125mW, Pricing 1="1 = 0.10000, 10 = 0.09000, 100 = 0.03460, 1000 = 0.01522, 2500 = 0.01315 (USD)", Resistance=10R, RoHS=Yes, Stock 1=569278, Supplier 1=Digi-Key, Termination=SMD/SMT, Width=1.25mm
R4 R5: library part AC0805FR-071RL, "Thick Film Resistors - SMD 1/8W 1ohm 1% AEC-Q200", Case/Package=0805, Case Code (Metric)=2012, Manufacturer=Yageo, Max Operating Temperature=155°C, Max Power Dissipation=125mW, Min Operating Temperature=-55°C, Supplier Part Number 1=YAG3705CT-ND, Temperature Coefficient=200ppm/°C, Tolerance=1%, Voltage Rating=150V, Case Code (Imperial)=0805, ComponentLink1Description=http://www.mouser.com/ds/2/447/yageodocoutput-1111992.pdf, ComponentLink1URL=http://www.mouser.com/ds/2/447/yageodocoutput-1111992.pdf, Composition="Thick Film", Features="Automotive AEC-Q200,Moisture Resistant", Height=0.024inch, Lead Free="Lead Free", Length=0.079inch, Manufacturer Part Number=AC0805FR-071RL, Number of Terminations=2, Packaging="Tape and Reel", Power Rating=125mW, Pricing 1="1 = 0.10000, 10 = 0.09000, 100 = 0.03460, 1000 = 0.01522, 2500 = 0.01315 (USD)", Resistance=1R, RoHS=Yes, Stock 1=34903, Supplier 1=Digi-Key, Termination=SMD/SMT, Weight=0.000194oz, Width=0.049inch
R6 R7 R9 R10: library part AC0805FR-07200KL, "Thick Film Resistors - SMD 1/8W 200K ohm 1%", Case/Package=0805, Case Code (Metric)=2012, Manufacturer=Yageo, Max Operating Temperature=155°C, Max Power Dissipation=125mW, Min Operating Temperature=-55°C, Resistance=200kR, Supplier Part Number 1=YAG3706CT-ND, Temperature Coefficient=100ppm/°C, Tolerance=1%, Voltage Rating=150V, Case Code (Imperial)=0805, Composition="Thick Film", Features="Automotive AEC-Q200,Moisture Resistant", Height=0.024inch, Lead Free="Lead Free", Length=0.079inch, Manufacturer Part Number=AC0805FR-07200KL, Number of Terminations=2, Packaging="Tape and Reel", Power Rating=125mW, Pricing 1="1 = 0.10000, 10 = 0.05000, 100 = 0.02050, 1000 = 0.00921, 2500 = 0.00799 (USD)", RoHS=Yes, Stock 1=46086, Supplier 1=Digi-Key, Termination=SMD/SMT, Width=0.049inch
R8 R11: library part AC0805FR-0710KL, "RES SMD 10K OHM 1% 1/8W 0805", Case/Package=0805, Case Code (Metric)=2012, Manufacturer=Yageo, Max Operating Temperature=155°C, Max Power Dissipation=125mW, Min Operating Temperature=-55°C, Package Quantity=1, Resistance=10kR, Supplier Part Number 1=311-10KLGCT-ND, Temperature Coefficient=100ppm/°C, Tolerance=1%, Voltage Rating=150V, Case Code (Imperial)=0805, ComponentLink1Description=http://www.yageo.com/NewPortal/yageodocoutput?fileName=/pdf/R-Chip/PYu-AC_51_RoHS_L_6.pdf, ComponentLink1URL=http://www.yageo.com/NewPortal/yageodocoutput?fileName=/pdf/R-Chip/PYu-AC_51_RoHS_L_6.pdf, Composition="Thick Film", Depth=1.25mm, Features="Anti-Sulfur,Automotive AEC-Q200,Moisture Resistant", Height=0.024inch, Lead Free="Lead Free", Length=0.079inch, Manufacturer Part Number=AC0805FR-0710KL, Military Standard=Not, Number of Terminations=2, Packaging="Tape and Reel", Power Rating=125mW, Pricing 1="1 = 0.10000, 10 = 0.05000, 100 = 0.02050, 1000 = 0.00921, 2500 = 0.00799 (USD)", RoHS=Yes, Stock 1=802268, Supplier 1=Digi-Key, Termination=SMD/SMT, Width=0.049inch
R12 R14 R16 R17 R18: library part RES
U1: "IC MAIN PWR CTRLR QUAD 32-QFN", Case/Package=QFN, Manufacturer=Intersil, Max Operating Temperature=100°C, Min Operating Temperature=-40°C, Output Current=20A, Package Quantity=60, Supplier Part Number 1=ISL6236AIRZ-ND, Switching Frequency=500kHz, ComponentLink1Description=http://www.intersil.com/content/dam/Intersil/documents/isl6/isl6236a.pdf, ComponentLink1URL=http://www.intersil.com/content/dam/Intersil/documents/isl6/isl6236a.pdf, Height=0.95mm, Lead Free="Lead Free", Length=5mm, Manufacturer Part Number=ISL6236AIRZ, Mount="Surface Mount", Number of Outputs=2, Packaging=Rail/Tube, Pricing 1="600 = 3.81800 (USD)", Radiation Hardening=No, RoHS=Yes, Supplier 1=Digi-Key, Width=5mm

## Via types
v1: diameter 0.6, hole 0.3, L1 to L6, tented both sides, 100 vias

## Nets (pads, with @x,y where several pads share a name; then routed paths per layer and width w, separated by ;. In a path a pad name is that pad's centre, name@x,y a point inside that pad or via, vN(x,y) a via of type N, cw(c..) or ccw(c..) an arc to the next point about the centre after c; other vN are vias at no path point)
+1V5: C9.1 J3.1 L1.1 R12.2 U1.10 | length 17.8
  L3 w1: v1(30.8,19.55) 32.25,18.1 33.8,18.1 38.6,13.3 v1(38.6,12)
  L6 w0.2: U1.10 26.25,22.05 26.65,21.65 27.328,21.65
  L6 w0.5: 27.309,21.631 29.389,19.55 R12.2 v1(30.8,19.55)
+1V05: C10.1 J4.1 L2.2 U1.30 | length 18.5
  L3 w1: v1(25.45,28.9) 32.35,35.8 36.4,35.8 v1(38.6,38)
  L6 w0.2: v1(25.45,28.9) 25.45,28.45 25.75,28.15 U1.30
+5V_LDO: C1.2 R1.2 U1.7 | length 24.8
  L3 w1: v1(12.7,25) 18.314,25 18.714,24.6 22.3,24.6 22.6,24.9 28.15,24.9 v1(30.05,23)
  L6 w0.2: U1.7 28.05,23.75 28.5,23.3
  L6 w0.5: v1(12.7,25) R1.2 ; 28.5,23.3 28.5,22.35 29.15,21.7 C1.2 v1(30.05,23)
+5V_PVCC: C3.2 R1.1 R2.2 R3.1 U1.19 | length 12.9
  L6 w0.2: 21.4,24.25 U1.19
  L6 w0.5: C3.2 20.5,24.7 20.95,24.25 21.4,24.25
  L6 w0.7: R1.1 15.65,26 ; R3.1 15.65,26 ; C3.2 19.85,25.7 19.55,26 15.65,26
+5V_VCC: C4.2 R3.2 R8.2 R9.2 R10.2 R11.2 R13.2 R16.2 U1.2 U1.3 U1.20 | length 17.1
  L6 w0.2: v1(21.6,25.6) 21.6,25.1 21.95,24.75 U1.20 ; U1.3 27.95,25.75 28.8,26.6 28.8,26.85 ; U1.2 27.75,26.25 28,26.5 v1(28,27.3)
  L6 w0.5: v1(12.7,29.6) R3.2 ; v1(12.7,32.7) R10.2 ; v1(12.7,35.1) R9.2 ; v1(22.7,16.6) R11.2 ; R16.2 v1(27.35,36.95) ; v1(27.4,16.6) R13.2 ; 28.8,26.85 28.8,28.25 30.15,29.6 C4.2 v1(30.15,30.85) ; v1(28.9,35.9) R8.2
+REF: C12.1 R14.2 U1.1 | length 10.8
  L6 w0.2: U1.1 27.4,27.825
  L6 w0.5: R14.2 29.65,33.6 C12.1 30.15,32.55 28.05,30.45 28.05,28.7 27.4,28.05 27.4,27.825
+VIN: C2.2 C5.2 C6.2 J1.1 Q1.8 Q2.8 R2.1 U1.6 | length 6.9
  L6 w0.2: U1.6 28.45,24.25
  L6 w0.5: v1(12.5,28.5) 12.5,28 13.2,27.3 R2.1 ; 28.45,24.25 28.7,24 29.95,24 C2.2 30.15,25.1 30.35,25.3 v1(31.1,25.3)
+VREF3: C11.1 R15.2 U1.5 | length 26.1
  L6 w0.2: U1.5 28.118,24.75 28.367,25 28.9,25
  L6 w0.5: R15.2 R15.2@27.6,38.2 ; 28.9,25 30.15,26.25 C11.1
  L6 w0.9: R15.2@27.6,38.2 33.595,38.2 35.1,36.695 35.1,29 33.95,27.85 30.7,27.85 30.15,27.3 C11.1
EN1: R11.1 U1.14 | length 3.7
  L6 w0.2: R11.1 22.7,20.1 24.25,21.65 U1.14
EN_LDO: R8.1 U1.4 | length 16.9
  L6 w0.2: U1.4 28.016,25.25 29.35,26.584 29.35,27.561 30.489,28.7 33.23,28.7 33.9,29.37 33.9,35.095 33.095,35.9 R8.1
FB1: R12.1 R13.1 R17.2 U1.11 | length 9.9
  L6 w0.2: U1.11 25.75,21.75 26.05,21.45
  L6 w0.5: 26.05,21.45 27.4,20.1 R13.1 27.45,19.5 28.3,19.5 28.55,19.25 28.55,17.95 28.85,17.65 R12.1 R17.2
GND: C1.1 C2.1 C3.1 C4.1 C5.1 C6.1 C9.2 C10.2 C11.2 C12.2 J2.1 J5.1 J6.1 Q1.2 Q1.3 Q2.2 Q2.3 R6.2 R7.1 R17.1 R18.1 U1.8 U1.21 U1.22 U1.29 U1.33 | length 12.4
  L6 w0.2: U1.21 U1.33@24.75,25.25 ; U1.22 24.25,25.75 U1.33@24.75,25.25 ; v1(24.5,29.4) 24.5,28.751 25.25,28.001 U1.29 ; U1.33 U1.33@24.75,25.25 ; U1.8 27.4,22.6 v1(27.7,22.3)
  L6 w0.5: v1(24.75,31.65) R6.2 ; v1(25,16.6) R7.1 ; R18.1 v1(28.4,40.5) ; R17.1 v1(33.05,19.55)
  other v1: 9.5,8.5 11.5,8.5 8.5,9.5 10.5,9.5 9.5,10.5 11.5,10.5 8.5,11.5 10.5,11.5 9.5,12.5 8.5,13.5 9.5,14.5 10.4,14.5 8.5,15.5 10.4,15.5 36.9,18.6 40.3,18.6 14.1,19.1 14.1,20 36.9,20.6 40.3,20.6 14.1,20.9 34,21.3 37.8,22 39.4,22 34,22.1 17.6,23.6 18.3,23.6 32.9,23.8 23.9,23.9 26.1,23.9 32.9,24.6 23.9,26.1 26.1,26.1 32.9,26.1 32.9,26.9 37.8,28 39.4,28 32.9,29.4 36.9,29.4 40.3,29.4 32.9,30.2 36.9,31.4 40.3,31.4 9.5,32.5 11.5,32.5 31.7,32.6 32.4,32.6 8.5,33.5 10.5,33.5 9.5,34.5 11.5,34.5 8.5,35.5 10.5,35.5 9.5,36.5 8.5,37.5 9.5,38.5 10.4,38.5 8.5,39.5 10.4,39.5 19.1,43.1 19.1,44 19.1,44.9
LGATE1: Q1.4 U1.18 | length 21.2
  L1 w0.5: Q1.4@12.173,13.095 v1(13.5,13.095)
  L3 w1: v1(13.5,13.095) 12,14.595 12,20.3 13.9,22.2 20.1,22.2 v1(21,23.1)
  L6 w0.2: v1(21,23.1) 21.028,23.1 21.678,23.75 U1.18
LGATE2: Q2.4 U1.23 | length 18.1
  L1 w0.5: Q2.4@12.173,37.095 v1(13.5,37.095)
  L3 w1: v1(13.5,37.095) 14.2,36.395 14.2,31.047 18.147,27.1 20.7,27.1 v1(21.2,26.6)
  L6 w0.2: v1(21.2,26.6) 21.55,26.25 U1.23
NetC7_2: C7.2 R4.1 | length 2.4
  L6 w0.2: C7.2 18,20.15 18,21 18.15,21.15 R4.1
NetC8_1: C8.1 R5.2 | length 2.4
  L6 w0.2: C8.1 17.95,28.7 18.15,28.5 R5.2
NetR4_2: R4.2 U1.17 | length 2.9
  L6 w0.2: R4.2 20.15,22.5 21.249,22.5 21.999,23.25 U1.17
NetR5_1: R5.1 U1.24 | length 2.8
  L6 w0.2: R5.1 21.3,27.4 21.95,26.75 U1.24
NetR6_1: R6.1 U1.31 | length 2.6
  L6 w0.2: R6.1 25.85,29.75 26.1,29.5 26.1,28.7 26.25,28.55 U1.31
NetR7_2: R7.2 U1.12 | length 3.2
  L6 w0.2: R7.2 25,20.3 25.25,20.55 U1.12
PHASE1: C7.1 L1.2 Q1.5 Q1.6 Q1.7 U1.16 | length 12.4
  L3 w1: v1(19.2,13.1) 19.85,13.75 v1(19.85,18.6)
  L6 w0.2: 22.725,22.6 U1.16
  L6 w0.5: v1(19.85,18.6) C7.1 21.1,20.1 21.8,20.8 21.8,21.901 22.499,22.6 22.725,22.6
PHASE2: C8.2 L2.1 Q2.5 Q2.6 Q2.7 U1.25 | length 12.4
  L3 w1: v1(19.2,37.095) 19.85,36.445 v1(19.85,31.2)
  L6 w0.2: 22.676,27.4 U1.25
  L6 w0.5: v1(19.85,31.2) C8.2 20.892,29.7 21.4,29.192 21.4,28.464 22.464,27.4 22.676,27.4
POK1: R10.1 U1.13 U1.27 | length 37.4
  L3 w0.2: v1(23.25,30.5) 23.25,29.45 26,26.7 31,26.7 32,25.7 32,22.8 29.6,20.4 v1(24.3,20.4)
  L6 w0.2: R10.1 21.05,32.7 v1(23.25,30.5) 23.25,28.87 24.235,27.885 24.235,27.415 U1.27 ; v1(24.3,20.4) 24.75,20.85 U1.13
POK2: R9.1 U1.28 | length 15.1
  L6 w0.2: R9.1 21.885,35.1 23.9,33.085 23.9,28.786 24.75,27.936 U1.28
REFIN2: R14.1 R15.1 R16.1 R18.2 U1.32 | length 14.4
  L6 w0.2: U1.32 26.75,28.95
  L6 w0.5: R18.2 R15.1 R16.1 R14.1 25.45,32.7 25.65,32.5 26.6,32.5 27,32.1 27,29.2 26.75,28.95
UGATE1: Q1.1 U1.15 | length 14.3
  L1 w0.5: Q1.1@12.173,16.905 v1(13.5,16.905)
  L3 w1: v1(13.5,16.905) 15.605,16.905 18.9,20.2 21.9,20.2 v1(23.3,21.6)
  L6 w0.2: v1(23.3,21.6) 23.75,22.05 U1.15
UGATE2: Q2.1 U1.26 | length 25.6
  L1 w0.5: v1(10.4,40.9) 12.168,40.9 Q2.1@12.173,40.905
  L3 w1: v1(10.4,40.9) 15.5,40.9 17.2,39.2 17.2,31.2 19,29.4 21.705,29.4 v1(22.3,28.805)
  L6 w0.2: v1(22.3,28.805) 22.749,28.805 23.75,27.804 U1.26
pads on no net: U1.9

## Polygon pours and split planes (outlines as drawn)
GND on L1 (solid, pour order 164): 13,16 8.5,16 8,15.5 8,8.5 8.5,8 12,8 12,12.4 10.75,12.4 10.55,12.6 10.55,13.6 10.75,13.8 13,13.8
GND on L1 (solid, pour order 152): 13,40 8.5,40 8,39.5 8,32.5 8.5,32 12,32 12,36.4 10.75,36.4 10.55,36.6 10.55,37.6 10.75,37.8 13,37.8
GND on L1 (solid, pour order 100): 40.7,17.8 36.5,17.8 36.5,22.4 40.7,22.4
GND on L1 (solid, pour order 96): 36.5,32.2 40.7,32.2 40.7,27.6 36.5,27.6
GND on L1 (solid, pour order 92): 15.5,18.7 13.71,18.7 13.71,21.3 15.5,21.3
GND on L1 (solid, pour order 90): 17.7,45.3 19.49,45.3 19.49,42.7 17.7,42.7
+VIN on L1 (solid, pour order 88): 16.5,16.5 21.5,16.5 21.5,25 20,26.5 8,26.5 7.5,27 7.5,27.5 8,28 29,28 29.5,27.5 29.5,24.5 32.5,24.5 32.5,30 31,31.5 8,31.5 7.5,32 7.5,41 8,41.5 13,41.5 14,40.5 18.7,40.5 18.7,42 17,42 16.5,42.5 16.5,45.5 15.5,46.5 3,46.5 2,45.5 2,23.5 3,22.5 15.5,22.5 16.5,21.5
+1V05 on L1 "L1-+1V05" (solid, pour order 66): 30.3,33.8 30.3,39.8 34.3,39.8 35.7,38.4 47.2,38.4 47.2,33.8
+1V5 on L1 "L1-+1V5" (solid, pour order 62): 30.3,16.2 30.3,10.2 34.3,10.2 35.7,11.6 47.2,11.6 47.2,16.2
PHASE1 on L1 "L1-PHASE1" (solid, pour order 32): 16.5,16 24.3,16 24.3,10.2 18.9,10.2 16.5,12.6
PHASE2 on L1 "L1-PHASE2" (solid, pour order 20): 16.5,40 24.3,40 24.3,34.2 19.1,34.2 16.5,36.8
GND on L6 (solid, pour order 146): 17.2,23.25 17.2,25.4 18.7,25.4 18.7,23.25
GND on L6 (solid, pour order 144): 34.3,22.5 34.3,20.9 32.7,20.9 32.7,22.5
GND on L6 (solid, pour order 142): 33.2,24.9 33.2,23.5 31.6,23.5 31.6,24.9
GND on L6 (solid, pour order 140): 33.2,27.2 33.2,25.8 31.6,25.8 31.6,27.2
GND on L6 (solid, pour order 126): 33.2,30.5 33.2,29.1 31.6,29.1 31.6,30.5
GND on L6 (solid, pour order 124): 31.3,32.2 31.3,34.3 32.8,34.3 32.8,32.2
+5V_VCC on L4 (solid, pour order 162): 7.5,5 42.5,5 42.5,44.9 42.4,45 7.5,45
GND on L2 (split plane): 49.49,0.51 0.51,0.51 0.51,49.49 49.49,49.49
GND on L5 (split plane): 49.49,0.51 0.51,0.51 0.51,49.49 49.49,49.49

## Other copper
L1:
  text "FEDEVEL Academy" at 2,4 h1.52
  text "Schematic & PCB Design Courses" at 2,2 h1.2

## Silkscreen, mask and mechanical layers (free items; w line width, h text height)
Top Overlay:
  text "+OUT2" at 40.5,39 h1.52
  text "+VIN" at 1.9,32.6 h1.52
  text "GND" at 43,26 h1.52
  text "GND" at 43,22.5 h1.52
  text "GND" at 2.8,15.9 h1.52
  text "+OUT1" at 41,9.3 h1.52
Bottom Overlay:
  text "ISL6236A DEMO V1I1" at 42,46 h2
  text "1" at 28.6,26.5 h0.9
  text "(C) 2019 FEDEVEL" at 48,5 h1.52
  text "http://www.fedevel.com/academy" at 48,2 h1.52
Top Solder:
  text "FEDEVEL Academy" at 2,4 h1.52
  text "Schematic & PCB Design Courses" at 2,2 h1.2
Board Outline:
  the board outline again, w0.5

## Text inside footprints (layer, text, board x,y; h text height)
Q1: Top Overlay "1" at 11.2,17.9 h0.9 r270
Q2: Top Overlay "1" at 11.2,41.9 h0.9 r270